# EAGLE board Output_Shield_j (EAGLE 5.06)
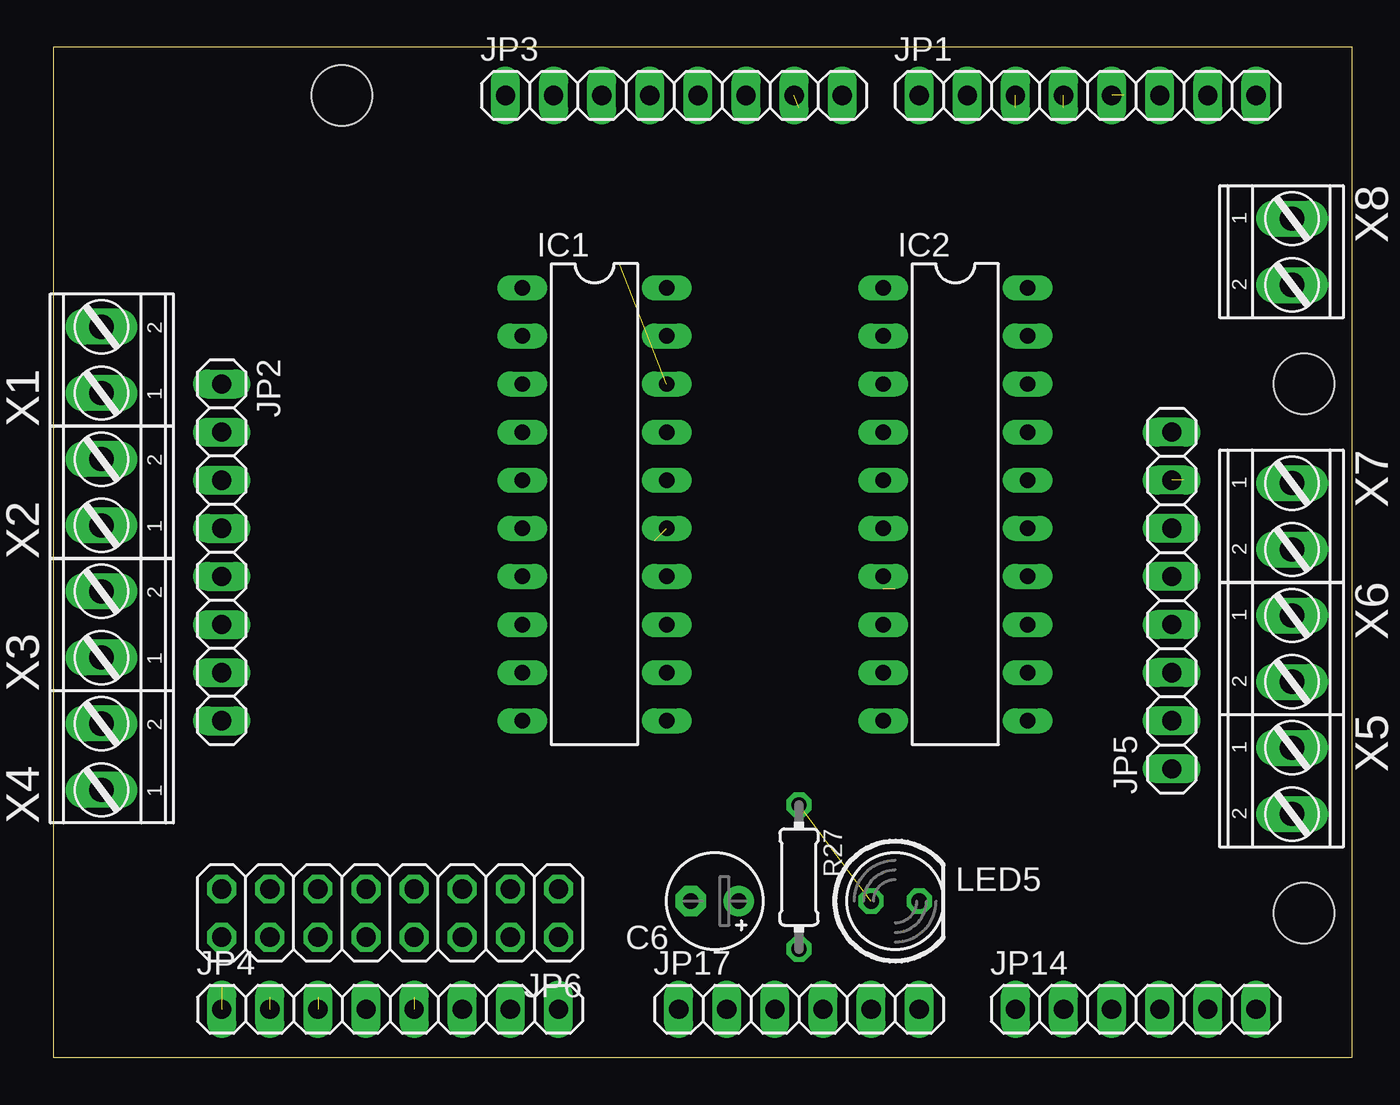
[diagram p0: board, top side]
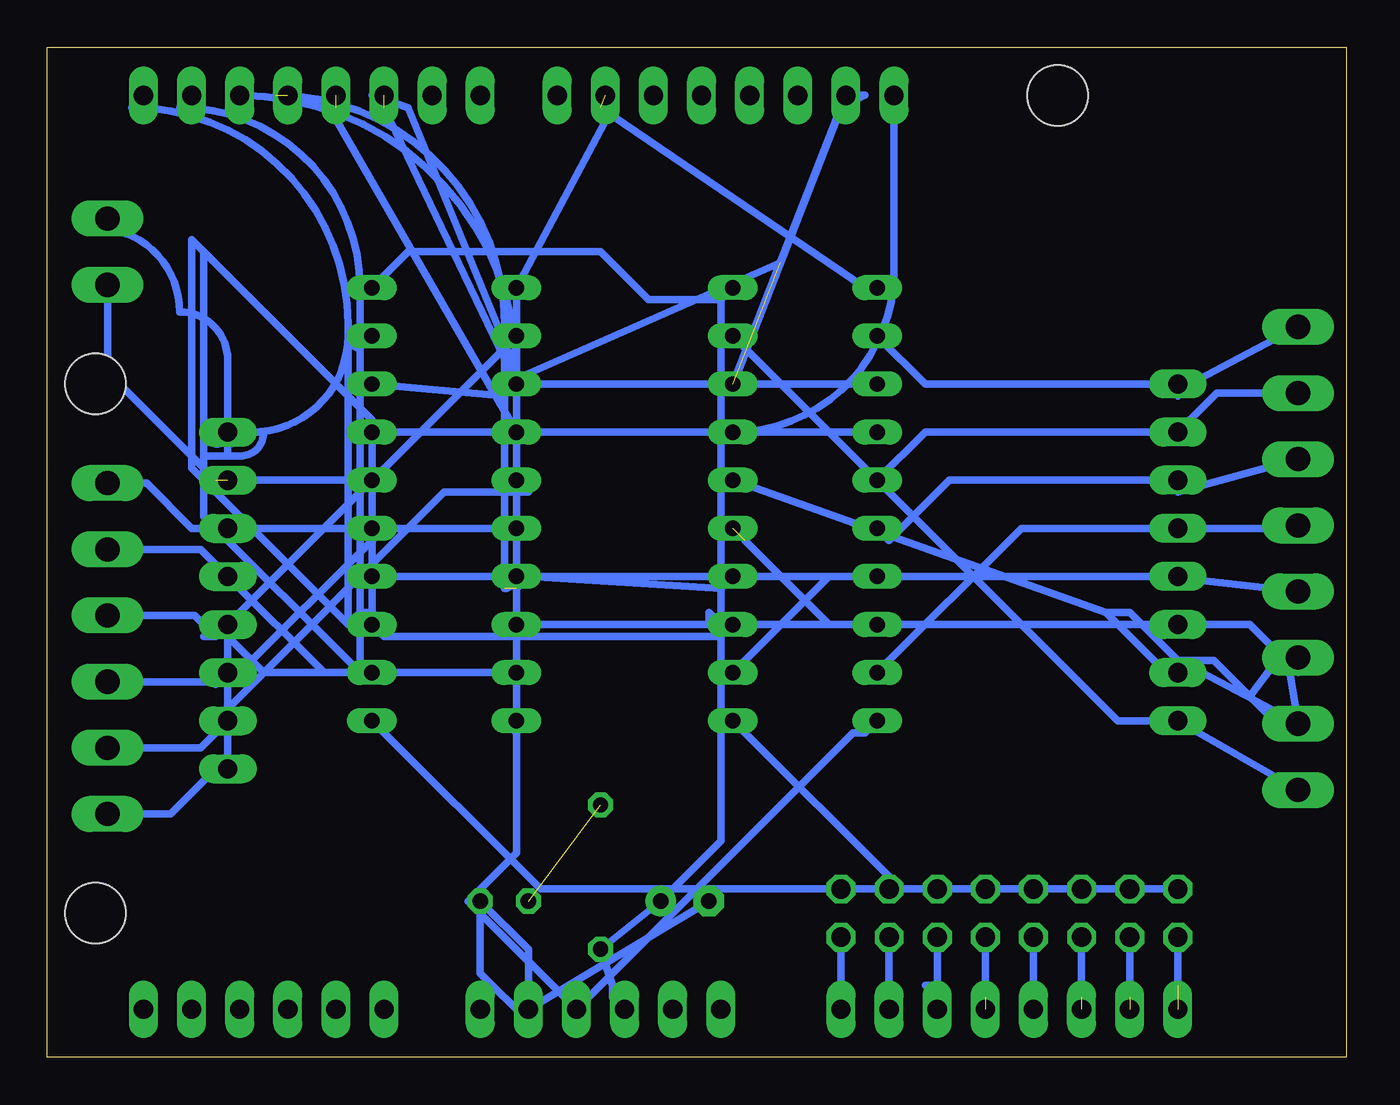
[diagram p1: board, bottom side, seen from below]

Size 68.58 x 53.34 mm. Coordinates in mm from the lower left corner, seen from the top.
Outline: 0,0 68.58,0 68.58,53.34 0,53.34 0,0
Copper layers (1*16): Top 0.035mm / dielectric 1.5mm / Bottom 0.035mm
Design rules "default": minimum track width 10mil, minimum drill 24mil, track to track 8mil, track to pad 8mil, pad to pad 8mil, via to via 8mil, smd to smd 8mil, copper to edge 40mil, drill to drill 8mil, minimum pad ring 10mil, minimum via ring 8mil, stop-mask expansion 4mil, vias tented up to drill 0mil, thermal gap 10mil
Holes 3.2 mm at 66.04,35.56 66.04,7.62 15.24,50.8

## Footprints (pad centres in the part's own frame; a part is rotated, then mirrored left to right if it is on the bottom)
E2,5-5 = drill 0.813 pad 1.6 round: + -1.27,0 | drill 0.813 pad 1.6 octagon: - 1.27,0
DIL20 = drill 0.813 long: 1 -11.43,-3.81; 2 -8.89,-3.81; 3 -6.35,-3.81; 4 -3.81,-3.81; 5 -1.27,-3.81; 6 1.27,-3.81; 7 3.81,-3.81; 8 6.35,-3.81; 9 8.89,-3.81; 10 11.43,-3.81; 11 11.43,3.81; 12 8.89,3.81; 13 6.35,3.81; 14 3.81,3.81; 15 1.27,3.81; 16 -1.27,3.81; 17 -3.81,3.81; 18 -6.35,3.81; 19 -8.89,3.81; 20 -11.43,3.81
1X08 = drill 1.016 long: 1 -8.89,0; 2 -6.35,0; 3 -3.81,0; 4 -1.27,0; 5 1.27,0; 6 3.81,0; 7 6.35,0; 8 8.89,0
2X08 = drill 1.016 octagon: 1 -8.89,-1.27; 2 -8.89,1.27; 3 -6.35,-1.27; 4 -6.35,1.27; 5 -3.81,-1.27; 6 -3.81,1.27; 7 -1.27,-1.27; 8 -1.27,1.27; 9 1.27,-1.27; 10 1.27,1.27; 11 3.81,-1.27; 12 3.81,1.27; 13 6.35,-1.27; 14 6.35,1.27; 15 8.89,-1.27; 16 8.89,1.27
1X06 = drill 1.016 long: 1 -6.35,0; 2 -3.81,0; 3 -1.27,0; 4 1.27,0; 5 3.81,0; 6 6.35,0
LED5MM = drill 0.813 octagon: A -1.27,0; K 1.27,0
0204/7 = drill 0.813 octagon: 1 -3.81,0; 2 3.81,0
AK550/2 = drill 1.27 long: 1 -1.75,0; 2 1.75,0

## Placement (x,y rotation side)
C6  [E2,5-5]  34.92,8.26 180 top
IC1  74LS374N  [DIL20]  28.57,29.21 270 top
IC2  74LS374N  [DIL20]  47.62,29.21 270 top
JP1  SHIELD_J1  [1X08]  54.61,50.8 0 top
JP2  OUT1  [1X08]  8.89,26.67 270 top
JP3  SHIELD_J3  [1X08]  32.77,50.8 0 top
JP4  IO_J1  [1X08]  17.78,2.54 0 top
JP5  OUT2  [1X08]  59.05,24.13 90 top
JP6  [2X08]  17.78,7.62 180 top
JP14  SHIELD_J2  [1X06]  57.15,2.54 0 top
JP17  POWER  [1X06]  39.37,2.54 0 top
LED5  POWER  [LED5MM]  44.45,8.26 0 top
R27  220  [0204/7]  39.37,9.53 270 top
X1  OUT1  [AK550/2]  2.54,36.83 90 top
X2  OUT2  [AK550/2]  2.54,29.84 90 top
X3  OUT3  [AK550/2]  2.54,22.86 90 top
X4  OUT4  [AK550/2]  2.54,15.88 90 top
X5  OUT5  [AK550/2]  65.41,14.61 270 top
X6  OUT6  [AK550/2]  65.41,21.59 270 top
X7  OUT7  [AK550/2]  65.41,28.57 270 top
X8  OUT8  [AK550/2]  65.41,42.55 270 top

## Library data of the parts
C6 = rcl
IC1 IC2 = 74xx-us
JP1-JP6 JP14 JP17 = pinhead
LED5 = led
R27 = resistor
X1-X8 = con-ptr500+_v5

## Nets
AREF: JP3.8
D0: IC1.3 IC2.3 JP1.3
D1: IC1.4 IC2.4 JP1.4
D2: IC1.7 IC2.7 JP1.5
D3: IC1.8 IC2.8 JP1.6
D4: IC1.13 IC2.13 JP1.7
D5: IC1.14 IC2.14 JP1.8
D6: IC1.17 IC2.17 JP3.1
D7: IC1.18 IC2.18 JP3.2
EN0: JP4.1 JP6.16
EN1: JP4.2 JP6.14
EN2: JP4.3 JP6.12
EN3: JP4.4 JP6.10
EN4: JP4.5 JP6.8
EN5: JP4.6 JP6.6
EN6: JP4.7 JP6.4
EN7: JP4.8 JP6.2
EN_OUT1: IC1.11 JP6.15
EN_OUT2: IC2.11 JP6.13
GND: C6.- IC1.1 IC1.10 IC2.1 IC2.10 JP3.7 JP17.4 JP17.5 LED5.K
MISO: JP3.5
MOSI: JP3.4
N$20: IC1.16 JP2.7 X4.2
N$22: IC1.19 JP2.8 X4.1
N$23: IC1.2 JP2.1 X1.2
N$24: IC1.5 JP2.2 X1.1
N$25: IC1.6 JP2.3 X2.2
N$26: IC1.9 JP2.4 X2.1
N$27: IC1.12 JP2.5 X3.2
N$28: IC1.15 JP2.6 X3.1
N$29: IC2.19 JP5.8 X8.1
N$31: IC2.16 JP5.7 X8.2
N$33: IC2.15 JP5.6 X7.1
N$39: LED5.A R27.1
N$55: IC2.2 JP5.1 X5.2
N$56: IC2.5 JP5.2 X5.1
N$57: IC2.6 JP5.3 X6.2
N$58: IC2.9 JP5.4 X6.1
N$59: IC2.12 JP5.5 X7.2
PC0: JP14.1
PC1: JP14.2
PC2: JP14.3
PC3: JP14.4
PC4: JP14.5
PC5: JP14.6
RESET: JP17.1
RXD: JP1.1
SCK: JP3.6
SS: JP3.3
TXD: JP1.2
VCC: C6.+ IC1.20 IC2.20 JP17.3 R27.2
VCC30: JP17.2
VIN: JP17.6

## Tracks (layer width: path | path; a pad name or v marks a point on that pad's centre or on a via)
D0  (1 unrouted)
  Bottom 0.406: IC1.3 IC2.3 50.8,50.16
D1  (1 unrouted)
  Bottom 0.406: 53.34,50.16 52.7,50.16 53.34,49.53 IC2.4 IC1.4
D2  (2 unrouted)
  Bottom 0.406: IC2.7 arc90 44.45,24.77 44.45,38.73 arc-90 56.52,50.8 | IC1.7 32.38,25.4 33.02,24.77 43.18,25.4 43.81,24.77
D3
  Bottom 0.406: IC1.8 43.18,22.86 43.81,22.23 IC2.8 43.81,36.2 arc-90 JP1.6
D4
  Bottom 0.406: IC1.13 33.02,22.86 33.66,23.5 33.66,22.86 33.02,22.23 50.8,22.23 IC2.13 | IC2.13 50.8,22.86 51.44,23.5 52.07,23.5 | 52.7,22.86 52.07,23.5 | 52.7,22.86 52.7,34.92 60.33,42.55 | 60.33,42.55 60.96,43.18 60.96,31.11 52.7,22.86 | IC2.13 52.07,22.86 | 52.07,22.86 52.7,22.86 | IC2.13 51.44,33.66 60.33,42.55 | 60.33,42.55 60.33,28.57 52.07,20.32 52.07,22.86 | 52.07,22.86 52.07,23.5 | 52.07,22.86 52.07,40.64 arc-90 61.59,50.16 60.96,50.16 JP1.7
D5
  Bottom 0.406: IC1.14 IC2.14 52.7,25.4 52.7,38.73 arc-90 64.14,50.16 63.5,50.16 JP1.8
D6
  Bottom 0.406: IC2.17 IC1.17 arc-90 23.88,41.53 JP3.1
D7  (1 unrouted)
  Bottom 0.406: IC1.18 26.67,50.16 25.4,50.8 JP3.2 | IC2.18 44.45,34.92 44.45,35.56 | 44.45,35.56 43.81,35.56 43.81,36.2 49.53,50.16 51.44,50.8 50.8,50.16 | 29.87,41.98 44.45,35.56
EN0  (1 unrouted)
  Bottom 0.406: JP6.16 8.89,3.81
EN1  (1 unrouted)
  Bottom 0.406: JP6.14 11.43,3.17
EN2  (1 unrouted)
  Bottom 0.406: JP6.12 13.97,3.17
EN3
  Bottom 0.406: JP6.10 JP4.4
EN4  (1 unrouted)
  Bottom 0.406: JP6.8 19.05,3.17
EN5
  Bottom 0.406: JP6.6 21.59,3.81 22.23,3.81 21.59,3.17 JP4.6
EN6
  Bottom 0.406: JP6.4 JP4.7
EN7
  Bottom 0.406: JP6.2 JP4.8
EN_OUT1
  Bottom 0.406: JP6.15 23.5,8.89 IC1.11
EN_OUT2
  Bottom 0.406: JP6.13 42.55,8.89 IC2.11
GND  (1 unrouted)
  Bottom 0.406: JP17.5 43.18,1.91 45.72,4.45 45.72,7.62 JP17.4 26.04,17.14 25.4,17.14 IC1.10 | JP17.5 43.18,5.71 LED5.K 46.35,8.26 43.81,10.79 43.81,17.14 44.45,17.78 IC2.10 IC2.1 38.73,50.16 39.37,50.16 25.4,40.64 IC1.1 | C6.- JP17.5
N$20
  Bottom 0.406: JP2.7 9.53,20.32 12.7,23.5 | 12.7,23.5 11.43,23.5 8.89,20.95 6.99,20.95 5.08,19.05 | 5.08,19.05 3.17,17.14 | 8.26,20.32 7.62,20.32 X4.2 3.17,21.59 5.08,19.05 | IC1.16 12.7,23.5
N$22
  Bottom 0.406: IC1.19 12.06,17.78 JP2.8 X4.1
N$23
  Bottom 0.406: IC1.2 22.23,35.56 JP2.1 8.89,34.92 8.26,35.56 X1.2
N$24
  Bottom 0.406: X1.1 6.83,35.08 JP2.2 22.23,33.02 IC1.5
N$25
  Bottom 0.406: 9.53,30.48 JP2.3 | 9.53,30.48 20.95,30.48 24.13,27.3 IC1.6 | X2.2 8.89,29.84 9.53,30.48
N$26
  Bottom 0.406: X2.1 3.02,28.57 3.17,28.57 3.81,27.94 JP2.4 17.14,27.94 IC1.9
N$27
  Bottom 0.406: 9.53,25.4 JP2.5 | 9.53,25.4 27.3,25.4 IC1.12 | X3.2 9.53,25.4
N$28  (1 unrouted)
  Bottom 0.406: X3.1 2.54,20.32 5.08,22.86 JP2.6 27.3,22.86 31.75,27.3
N$29
  Bottom 0.406: 58.42,33.02 57.78,33.02 arc-90 52.7,38.1 arc-90 52.07,37.47 arc90 IC2.19 | 58.42,33.02 JP5.8 arc90 59.69,32.38 59.69,33.02 | 59.69,33.02 60.33,33.02 60.33,31.75 59.05,31.75 | 59.05,31.75 58.42,31.75 arc-90 57.15,33.02 58.42,33.02 | 58.42,33.02 59.69,33.02 | 58.42,33.02 arc90 59.05,32.38 59.05,31.75 | 59.05,31.75 59.05,36.83 arc-90 61.59,39.37 arc-90 66.04,43.81 65.89,43.81 arc-90 X8.1
N$31  (1 unrouted)
  Bottom 0.406: X8.2 65.41,36.2 59.69,30.48 52.7,30.48 52.07,29.84 IC2.16
N$33
  Bottom 0.406: IC2.15 JP5.6 60.96,27.94 63.34,30.32 X7.1
N$39  (1 unrouted)
N$55
  Bottom 0.406: JP5.1 59.05,15.88 | 59.05,15.88 59.05,22.86 IC2.2 | X5.2 62.08,12.86 59.05,15.88
N$56
  Bottom 0.406: IC2.5 44.45,29.84 | IC2.5 44.45,30.48 | IC2.5 43.18,29.84 47.62,29.84 59.69,17.78 59.69,17.14 | 59.69,17.14 JP5.2 | X5.1 60.48,16.36 59.69,17.14
N$57
  Bottom 0.406: IC2.6 50.8,27.94 59.05,19.68 JP5.3 59.69,19.68 59.69,20.32 60.17,19.84 X6.2
N$58
  Bottom 0.406: IC2.9 57.15,20.32 59.05,22.23 JP5.4 59.69,22.23 | X6.1 60.8,23.34 59.69,22.23 | 60.33,22.23 59.69,22.23
N$59
  Bottom 0.406: IC2.12 53.98,20.32 JP5.5 60.48,26.82 X7.2
VCC
  Bottom 0.406: 33.02,40.01 IC1.20 | 33.02,40.01 33.02,11.43 C6.+ R27.2 38.73,3.81 38.73,3.17 JP17.3 | 33.02,40.01 36.83,40.01 39.37,42.55 49.53,42.55 IC2.20